# Altium PCB DIY_ST-Link_V21.PcbDoc
Units mm, origin at the board's own origin, x right, y up, seen from the top; angles counter-clockwise.
Board outline 45.5 x 38 mm, 2 copper layers (Top Layer, Bottom Layer), stack 1.581 mm thick; 66 components, 47 nets, 224 pads, 212 vias.
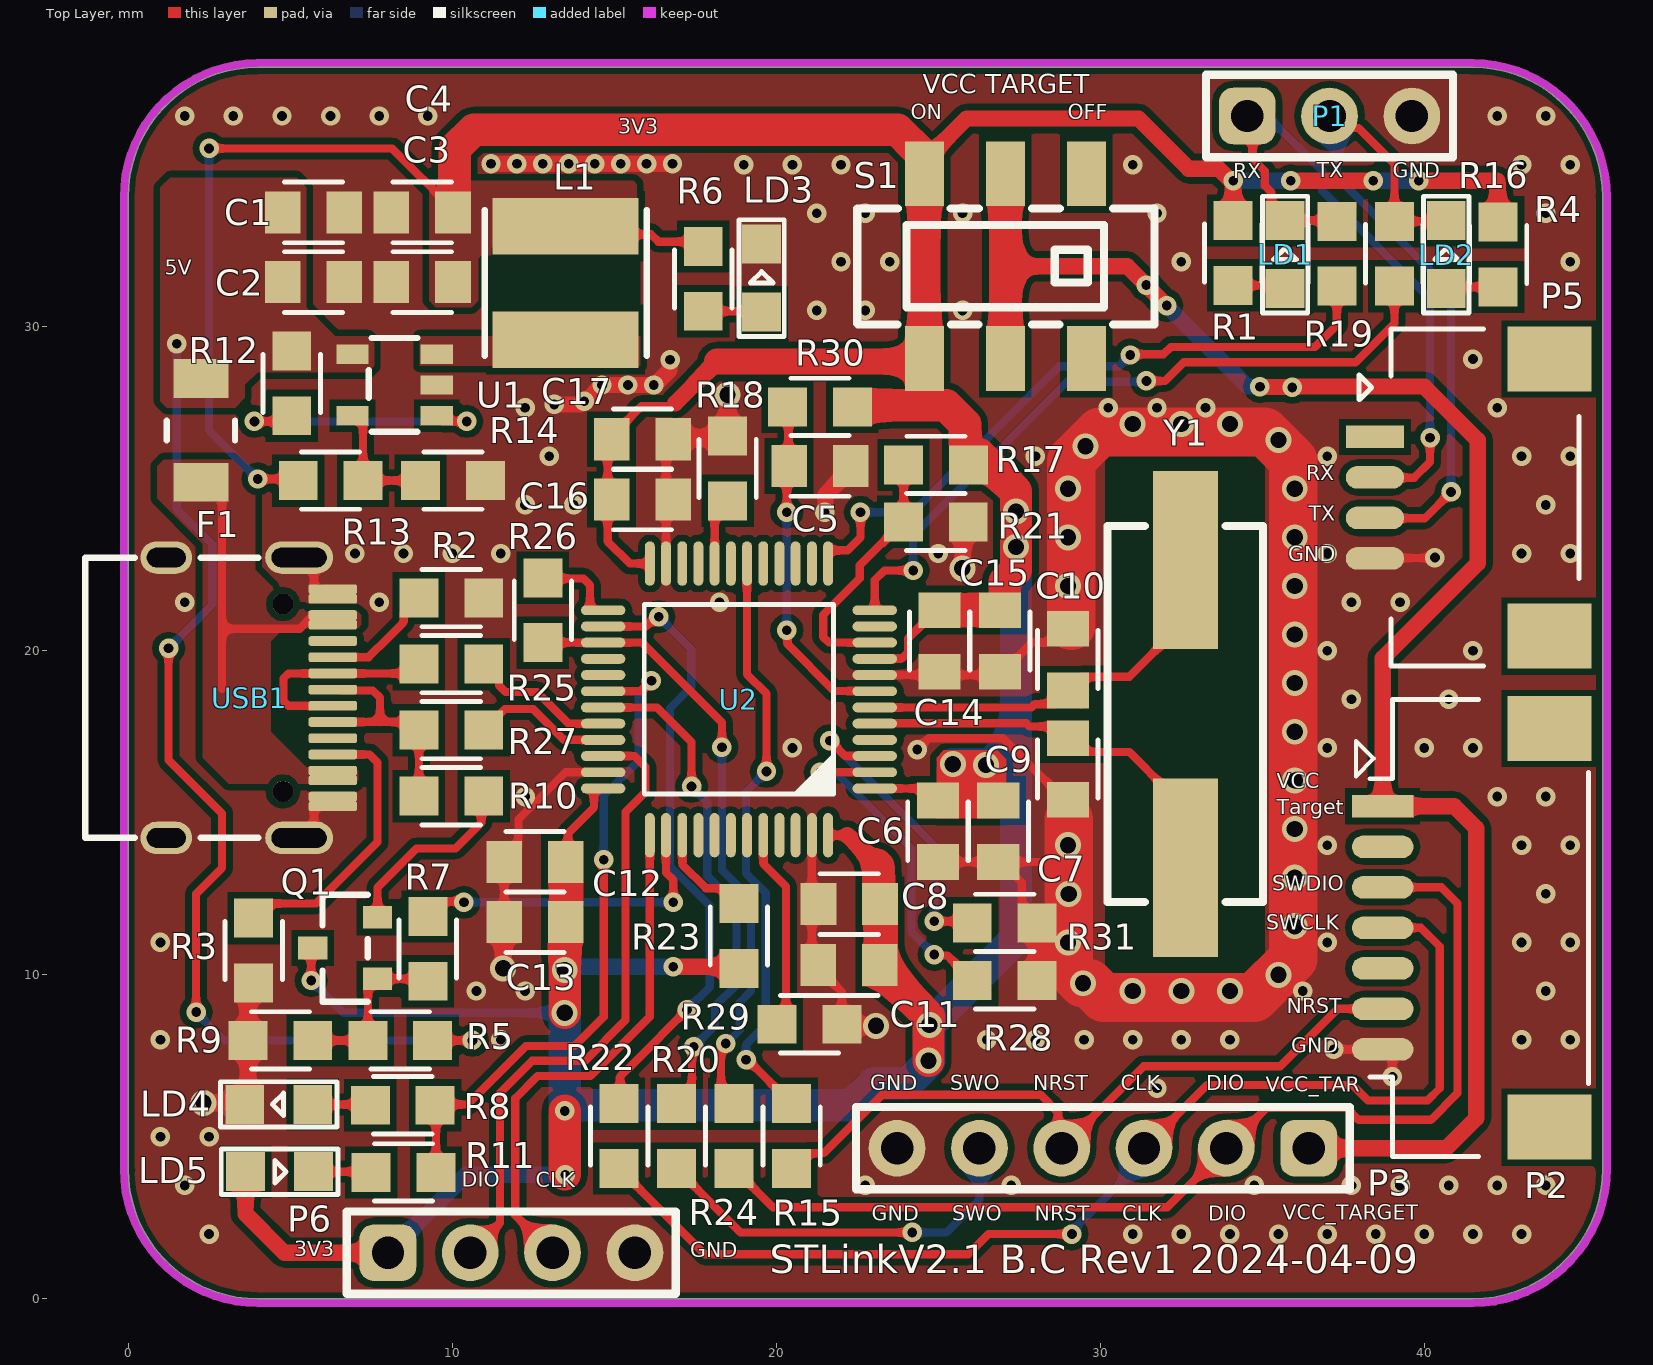
[diagram p0: Top Layer view]
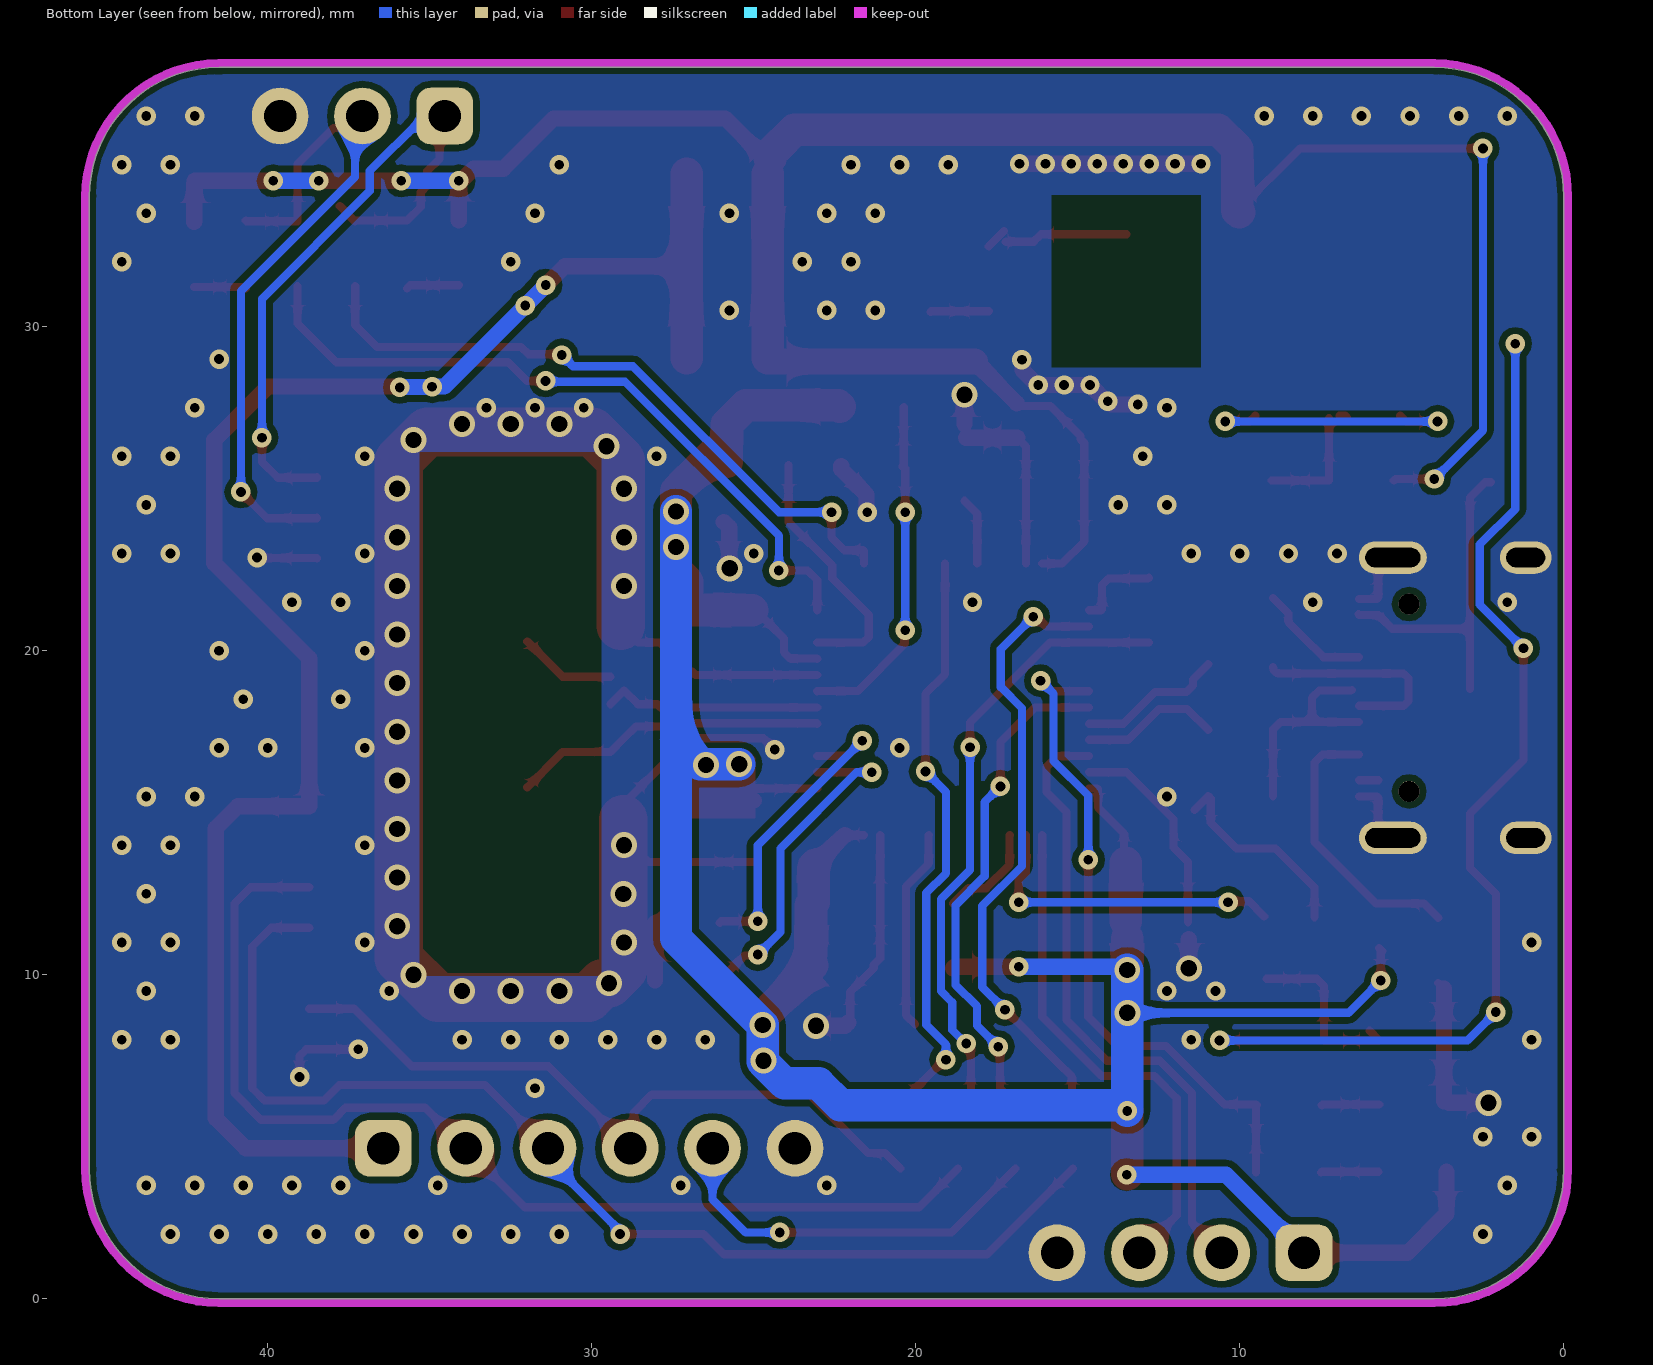
[diagram p1: Bottom Layer view, seen from below]
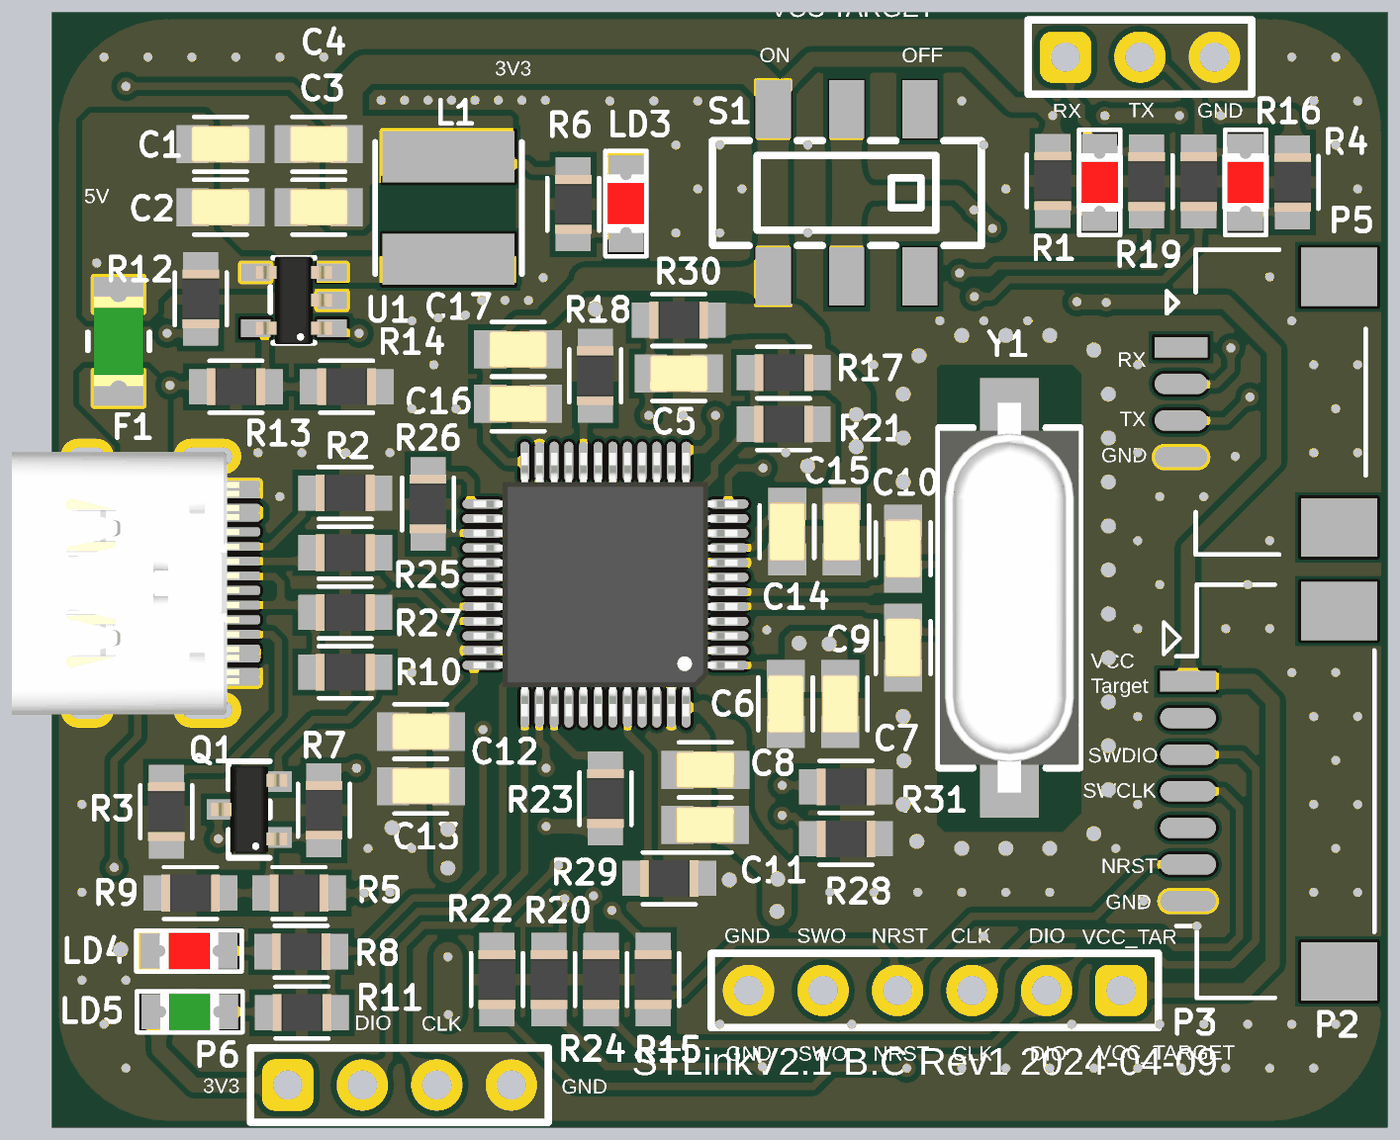
[diagram p2: 3D render of the assembled board from above, using the file's embedded part models]

## Layer stack, top to bottom
Top Solder: solder mask 0.0102, Solder Resist, Dk 3.5
Top Layer: signal copper 0.0356
Dielectric 1: dielectric 1.51, FR-4, Dk 4.8
Bottom Layer: signal copper 0.0356
Bottom Solder: solder mask 0.0102, Solder Resist, Dk 3.5

## Board outline
0,4 0,34 cw(c4,34) 4,38 41.5,38 cw(c41.5,34) 45.5,34 45.5,4 cw(c41.5,4) 41.5,0 4,0 cw(c4,4)

## Design rules (kind name [scope] priority, off if disabled: settings)
Clearance [All] p1: gap=0.2 ignorepadtopadclearanceinfootprint=TRUE
DiffPairsRouting [All] p1: maxlimit=0.254 minlimit=0.254 mostfreqgap=0.254 toplayer_minwidth=0.254 toplayer_maxwidth=0.381 toplayer_prefwidth=0.254 bottomlayer_minwidth=0.254 bottomlayer_maxwidth=0.381 bottomlayer_prefwidth=0.254 maxuncoupledlength=12.7
MinimumSolderMaskSliver [All] p1: minsoldermaskwidth=0
PlaneConnect [All] p1: planeconnectstyle=Direct reliefexpansion=0.508 reliefentries=4 reliefconductorwidth=0.254 reliefairgap=0.254
PolygonConnect [All] p1: connectstyle=Direct reliefconductorwidth=0.254 reliefentries=4 polygonreliefangle="90 Angle" airgapwidth=0.254
RoutingVias [All] p1: holewidth=0.5 width=0.8 viastyle="Through Hole" minholewidth=0.3 minwidth=0.5 maxholewidth=1 maxwidth=1.5
SilkToSilkClearance [All] p1: silktosilkclearance=0
SilkToSolderMaskClearance [IsPad] p1: minsilkscreentomaskgap=0 clearancetoexposedcopper=TRUE
SolderMaskExpansion [All] p1: expansion=0.102 istentingtop=FALSE
Width [All] p1: maxlimit=2 minlimit=0.254 preferedwidth=0.254 minimp=50.000000 maximp=50.000000 favimp=50.000000
25 further rules are at their usual default settings.

## Classes and differential pairs
differential pair USB: +USB_P -USB_N

## Components (designator, comment, footprint, x,y, rotation, side; value= is the part's Value field where it differs from the comment)
C1 "10u" 0805_CAP 5.725,33.525 r180 top
C2 "10u" 0805_CAP 5.725,31.375 r180 top
C3 "10u" 0805_CAP 9.075,31.375 r0 top
C4 "10u" 0805_CAP 9.075,33.525 r0 top
C5 "100n" 0805_CAP 21.35,25.7 r180 top
C6 "100n" 0805_CAP 24.993,14.429 r90 top
C7 "4.7u" 0805_CAP 26.85,14.429 r90 top
C8 "100n" 0805_CAP 22.254,12.182 r0 top
C9 "20p" 0805_CAP 29,16.35 r90 top
C10 "20p" 0805_CAP 29,19.725 r270 top
C11 "4.7u" 0805_CAP 22.25,10.3 r0 top
C12 "100n" 0805_CAP 12.554,13.482 r0 top
C13 "4.7u" 0805_CAP 12.554,11.625 r0 top
C14 "100n" 0805_CAP 25.043,20.304 r90 top
C15 "4.7u" 0805_CAP 26.9,20.304 r90 top
C16 "100n" 0805_CAP 15.871,24.668 r180 top
C17 "4.7u" 0805_CAP 15.871,26.525 r180 top
F1 "1Ah" 1206_PS 2.25,26.8 r90 top
L1 "3.3uH" IND_40x45x3.2 13.5,31.35 r90 top
LD1 "Red" LED0805_Red 35.7,32.225 r90 top
LD2 "Red" LED0805_Red 40.675,32.225 r90 top
LD3 "Red" LED0805_Red 19.55,31.5 r90 top
LD4 "Red" LED0805_Red 4.65,6 r180 top
LD5 "Green" LED0805_green 4.675,3.925 r0 top
P1 "PHDR1x3" HEADER_1X3 37.075,37.77 r0 top
P2 "A1253WRA" A1253WRA-7P 42.065,11.45 r270 top
P3 "HDR 1x6" HEADER_1x6 31.35,4.65 r180 top
P5 "A1253WRA" A1253WRA-4P 42.025,24.725 r270 top
P6 "HDR 1x4" HEADER_1x4 13.1,1.425 r0 top
Q1 "BC817" SOT23 6.7,10.825 r90 top
R1 "1K" 0805_res 34.1,32.275 r90 top
R2 "5.1K" 0805_res 9.975,21.625 r180 top
R3 "5.1K" 0805_res 3.875,10.75 r90 top
R4 "1K" 0805_res 42.275,32.225 r90 top
R5 "10K" 0805_res 8.4,7.975 r0 top
R6 "1K" 0805_res 17.75,31.475 r90 top
R7 "100R" 0805_res 9.25,10.8 r270 top
R8 "1K" 0805_res 8.475,5.975 r0 top
R9 "36K" 0805_res 4.7,7.975 r0 top
R10 "1.5K" 0805_res 9.975,15.512 r180 top
R11 "1K" 0805_res 8.5,3.9 r0 top
R12 "10K" 0805_res 5.05,28.25 r90 top
R13 "267K" 0805_res 6.25,25.25 r0 top
R14 "59K" 0805_res 10.025,25.25 r0 top
R15 "22R" 0805_res 20.475,5.025 r90 top
R16 "22R" 0805_res 39.075,32.25 r90 top
R17 "10K" 0805_res 24.929,25.732 r0 top
R18 "10K" 0805_res 18.5,25.625 r270 top
R19 "22R" 0805_res 37.3,32.25 r90 top
R20 "22R" 0805_res 16.925,5.025 r270 top
R21 "10K" 0805_res 24.925,23.975 r180 top
R22 "22R" 0805_res 15.15,5.025 r90 top
R23 "4.7K" 0805_res 18.85,11.2 r90 top
R24 "22R" 0805_res 18.7,5.025 r90 top
R25 "10R" 0805_res 9.975,19.587 r180 top
R26 "100R" 0805_res 12.8,21.25 r90 top
R27 "10R" 0805_res 9.975,17.55 r180 top
R28 "10K" 0805_res 27.05,9.825 r0 top
R29 "10K" 0805_res 21.025,8.475 r180 top
R30 "100K" 0805_res 21.35,27.525 r180 top
R31 "10K" 0805_res 27.05,11.6 r0 top
S1 "Slide DPDT" SW_DPDT_SMD 26.475,32.05 r180 top
U1 "MT3520B" SOT23-5 8.225,28.2 r180 top
U2 "STM32F103CBT6" LQFP-48 18.85,18.5 r180 top
USB1 "Type-C" Type-C-TOP 3.8,18.55 r180 top
Y1 "8MHz" Xtal_HC49_US 32.625,18.05 r90 top value="XTAL = 32MHz"

## Footprints (in the part's own frame and the unit in brackets; to place one, negate y for a bottom-side part, rotate by r counter-clockwise, add the part's x,y. Pads: shape width x height; smd on the part's side, far side on the other; paste and mask are expansions set on the pad)
0805_CAP [mm] "Capacitor standard 2012"
  rect 1.1x1.3 smd mask+0: 1(-0.95,0) 2(0.95,0)
  silkscreen extent -0.9,-0.94 0.9,0.94, body extent -1,-0.62 1,0.63, height 1
0805_res [mm] "Resistor standard 2012"
  rect 1.2x1.2 smd mask+0: 1(-1,0) 2(1,0)
  silkscreen extent -0.9,-0.89 0.9,0.89, body extent -1,-0.62 1,0.63, height 0.45
1206_PS [mm] "3216 - 3.2 x 1.6 x max 0.75mm high"
  rect 1.2x1.7 smd: 1(-1.6,0) 2(1.6,0)
  silkscreen extent -0.3,-1.05 0.3,1.05, body extent -1.52,-0.85 1.53,0.85, height 0.8
A1253WRA-4P [mm]
  rect 0.7x1.8 smd mask+0.1: 1(-1.875,-3.55)
  oval 0.7x1.8 smd mask+0.1: 2(-0.625,-3.55) 3(0.625,-3.55) 4(1.875,-3.55)
  rect 2x2.6 smd mask+0.1: ""(-4.275,1.84) ""(4.275,1.84)
  silkscreen extent -5.2,-4.04 5.2,2.75, body extent -5,-3 5,3, height 2.6
A1253WRA-7P [mm]
  rect 0.7x1.9 smd mask+0.1: 1(-3.75,-3.35)
  oval 0.7x1.9 smd mask+0.1: 2(-2.5,-3.35) 3(-1.25,-3.35) 4(0,-3.35) 5(1.25,-3.35) 6(2.5,-3.35) 7(3.75,-3.35)
  rect 2x2.6 smd mask+0.1: ""(-6.15,1.8) ""(6.15,1.8)
  silkscreen extent -7.05,-4.18 7.05,3, body extent -6.9,-3 6.9,2.9, height 2.6
HEADER_1X3 [mm] "Header 2.54mm pitch 3 pins with pin 1 marker"
  rrect50% 1.75x1.75 hole 1 mask+0: 1(-2.54,-1.27)
  round 1.75 hole 1 mask+0: 2(0,-1.27) 3(2.54,-1.27)
  silkscreen extent -3.81,-2.54 3.81,0, body extent -3.8,-2.54 3.81,0, height 8.6
HEADER_1x4 [mm] "Header 2.54mm pitch 4 pins"
  rrect50% 1.75x1.75 hole 1 mask+0: 1(-5.08,0)
  round 1.75 hole 1 mask+0: 2(-2.54,0) 3(0,0) 4(2.54,0)
  silkscreen extent -6.35,-1.27 3.8,1.27, body extent -6.33,-1.27 3.7,1.27, height 8.6
HEADER_1x6 [mm] "Header 2.54mm pitch 6 pins"
  rrect50% 1.75x1.75 hole 1 mask+0: 1(-5.08,0)
  round 1.75 hole 1 mask+0: 2(-2.54,0) 3(0,0) 4(2.54,0) 5(5.08,0) 6(7.62,0)
  silkscreen extent -6.35,-1.27 8.89,1.27, body extent -6.33,-1.27 8.89,1.27, height 8.6
IND_40x45x3.2 [mm]
  rect 1.75x4.5 smd: 1(-1.75,0) 2(1.75,0)
  silkscreen extent -2.25,-2.5 2.25,2.5, body extent -2.25,-2 2.25,2, height 3.2
LED0805_green [mm] "LED 0805, 2.0 x 1.2 x 0.4mm high"
  rect 1.2x1.2 smd: 1(-1.05,0) 2(1.05,0)
  silkscreen extent -1.8,-0.7 1.8,0.7, body extent -1,-0.62 1,0.63, height 1.08
LED0805_Red [mm] "LED 0805, 2.0 x 1.2 x 0.4mm high"
  rect 1.2x1.2 smd: 1(-1.05,0) 2(1.05,0)
  silkscreen extent -1.8,-0.7 1.8,0.7, body extent -1,-0.62 1,0.63, height 1.08
LQFP-48 [mil]
  oval 54x12 smd: 1(-165,108.27) 2(-165,88.58) 3(-165,68.9) 4(-165,49.21) 5(-165,29.53) 6(-165,9.84) 7(-165,-9.84) 8(-165,-29.53) 9(-165,-49.21) 10(-165,-68.9) 11(-165,-88.58) 12(-165,-108.27) 25(165,-108.27) 26(165,-88.58) 27(165,-68.9) 28(165,-49.21) 29(165,-29.53) 30(165,-9.84) 31(165,9.84) 32(165,29.53) 33(165,49.21) 34(165,68.9) 35(165,88.58) 36(165,108.27)
  oval 12x54 smd: 13(-108.27,-165) 14(-88.58,-165) 15(-68.9,-165) 16(-49.21,-165) 17(-29.53,-165) 18(-9.84,-165) 19(9.84,-165) 20(29.53,-165) 21(49.21,-165) 22(68.9,-165) 23(88.58,-165) 24(108.27,-165) 37(108.27,165) 38(88.58,165) 39(68.9,165) 40(49.21,165) 41(29.53,165) 42(9.84,165) 43(-9.84,165) 44(-29.53,165) 45(-49.21,165) 46(-68.9,165) 47(-88.58,165) 48(-108.27,165)
  silkscreen extent -115,-115 115,115, body extent -177,-177 177,177, height 61
SOT23 [mm] "SOT23- 3 pin foot print, 2.5 x 3 x 1.1 body, 1.5 x 3 x 1.1"
  rect 0.7x0.9 smd mask+0: 1(-0.95,-1) 2(0.95,-1) 3(0,1)
  silkscreen extent -1.65,-0.7 1.65,0.7, body extent -1.5,-1.3 1.5,1.3, height 1.1
SOT23-5 [mm] "SOT23-5, Body 1.6 x 2.9 x 1.3H, 1.95mm pitch"
  rect 1x0.6 smd: 1(-1.3,0.95) 2(-1.3,0) 3(-1.3,-0.95) 4(1.3,-0.95) 5(1.3,0.95)
  silkscreen extent -0.7,-1.45 0.8,1.45, body extent -1.3,-1.5 1.3,1.5, height 1.1
SW_DPDT_SMD [mm]
  rect 1.2x2 smd paste+0 mask+0.051: 1(-3.095,3.033) 2(-0.595,3.033) 3(1.905,3.033) 4(-3.095,-2.667) 5(-0.595,-2.667) 6(1.905,-2.667)
  silkscreen extent -5.19,-1.59 3.98,1.98, body extent -5.15,-1.55 3.95,1.95, height 5.5
Type-C-TOP [mm]
  round 0.65 hole 0.65: 0(-0.98,2.89) 0(-0.98,-2.89)
  oval 1.6x1 hole 0.6 slot 1.2 at 0 deg: 1(2.62,4.325) 2(2.62,-4.325)
  oval 2.1x1 hole 0.6 slot 1.7 at 0 deg: 3(-1.48,-4.325) 4(-1.48,4.325)
  rrect50% 1.5x0.3 smd: A1(-2.52,-3.35) A4(-2.52,-2.55) A5(-2.52,-1.25) A6(-2.52,-0.25) A7(-2.52,0.25) A8(-2.52,1.25) A9(-2.52,2.55) A12(-2.52,3.35) B1(-2.52,3.05) B4(-2.52,2.25) B5(-2.52,1.75) B6(-2.52,0.75) B7(-2.52,-0.75) B8(-2.52,-1.75) B9(-2.52,-2.25) B12(-2.52,-3.05)
  silkscreen extent -0.22,-4.33 5.12,4.33, body extent -2.57,-4.48 5.18,4.48, height 3.26
Xtal_HC49_US [mm] "Crystal HC49, 12.3 (Body 11.4) x 4.7 x 4.3"
  rect 5.5x2 smd mask+0: 1(-4.75,0) 2(4.75,0)
  silkscreen extent -5.8,-2.4 5.8,2.4, body extent -6.65,-2.37 6.65,2.36, height 4.51

## Part data
C1 C2 C3 C4 C5 C6 C7 C8 C9 C10 C11 C12 C13 C14 C15 C16 C17: library part CC_?F_0805, "Capacitor, Ceramic,, ?F, ?V, 0805"
F1: library part Fuse_PS_1A6V_3216, "Fuse, Polyswitch, 1Ah 1.8At, 6V, 8A @300msec, 210mRmax, 1206 [3216]", Category=Fuse, Supplier 2=Farnell, Supplier Part Number 2=1861192, URL=http://www.farnell.com/datasheets/1678471.pdf
L1: library part IND_?uH_4045, "https://www.lcsc.com/product-detail/Inductors-SMD_SHOU-HAN-CY43-3-3UH_C2929417.html"
LD1 LD2 LD3 LD4: library part LED_RED230mcd_2013, "LED, Red, 2.0V, Imax 30mA, 120deg. At 20mA => Wavelength = 630nm, 230mcd, 0805", Manufacturer=Kingbright, Category="Diode - LED", Mfg_PN=KPT-2012SURCK, Supplier 2=Farnell, Supplier Part Number 2=2099241, URL=http://www.farnell.com/datasheets/1753997.pdf, Used_for=Alarm
LD5: library part LED_GRN50mcd_2013, "LED, Green, 2.1V, Imax 30mA, 110deg. At 20mA => Wavelength = 570nm, 50mcd, 0805", Manufacturer=Kingbright, Category="Diode - LED", Mfg_PN=KPHCM-2012CGCK, Supplier 2=Element14, Supplier 3=Digikey, Supplier Part Number 2=1686075, Supplier Part Number 3=754-1127-1-ND, Used_for="ACC ON"
P1: library part Header1x3, "Header, 3 pin SIL, 2.54 pitch", Supplier Part Number 1=TE295, Category=Connector, Notes="TE295 is actually a 40 pin break away header", Supplier 1=Brooks
P2: library part A1253WRA-7P, "A1253WRA-4P", Supplier Part Number 1=TE295, Category=Connector, Date Updated=1/7/2014, Engineer’s Name=WZ, Notes="TE295 is actually a 40 pin break away header", Supplier 1=Brooks
P3: library part Header1x6, "Header_1x6", Supplier Part Number 1=TE295, Category=Connector, Notes="TE295 is actually a 40 pin break away header", Supplier 1=Brooks
P5: library part A1253WRA-4P, "A1253WRA-4P", Supplier Part Number 1=TE295, Category=Connector, Date Updated=1/7/2014, Engineer’s Name=WZ, Notes="TE295 is actually a 40 pin break away header", Supplier 1=Brooks
P6: library part Header1x4, "Header_1x4", Supplier Part Number 1=TE295, Category=Connector, Date Updated=1/7/2014, Engineer’s Name=WZ, Notes="TE295 is actually a 40 pin break away header", Supplier 1=Brooks
Q1: library part TR_BC817, "TRANSISTOR, NPN, SOT-23, 45V", Manufacturer=NXP, Category=Transistor, Mfg_PN=BC817, Note="TRANSISTOR, NPN, SOT-23, 45V", PackageDescription="3-Pin SOT-23 Package 0.95 mm Pitch, 2.3 mm Lead Span", PackageReference=SOT23, Supplier 2="Element 14", Supplier 3=Digikey, Supplier Part Number 2=1081223, Supplier Part Number 3=1727-2919-1-ND
R1 R2 R3 R4 R5 R6 R7 R8 R9 R10 R11 R12 R13 R14 R15 R16 R17 R18 R19 R20 R21 R22 R23 R24 R25 R26 R27 R28 R29 R30 R31: library part RS_?R_0805, "Resistor, ?ohm, 0805"
S1: library part SW_Slide_DPDT, "LCSC#: C2906280 / Mfr.#: MST22D18G2 125 / Mfr: SHOU HAN / Brick nogging 0.1A DPDT 12V Black 10000次 SMD Slide Switches ROHS"
U1: library part BUCK_MT3520B, "https://www.lcsc.com/product-detail/DC-DC-Converters_XI-AN-Aerosemi-Tech-MT3520B_C2684933.html"
U2: "ARM Cortex-M3 32-bit MCU, 128 KB Flash, 20 KB Internal RAM, 37 I/Os, 48-pin LQFP, -40 to 85 degC, Tray", I/Os (High Current)=37, Operating Frequency(F) (Processor speed) (MHz)=72, Supplier Part Number 1=497-6288-ND, Supply Voltage(Vcc) min (V)=2, A/D Converter="2x12-bit (10 Channel)", ComponentLink1Description="Manufacturer URL", ComponentLink1URL=http://www.st.com/web/en/home.html, ComponentLink2Description=Datasheet, ComponentLink2URL=http://www.st.com/st-web-ui/static/active/en/resource/technical/document/datasheet/CD00161566.pdf, ComponentLink3Description="Package Specification", ComponentLink3URL=http://www.st.com/st-web-ui/static/active/en/resource/technical/document/datasheet/DM00058181.pdf, Core="ARM Cortex-M3", DatasheetVersion="Rev. 16", FLASH Size (Prog) (kB)=128, Internal RAM Size (kB)=20, Mounting Technology="Surface Mount", PackageDescription="48-Pin Low Profile Quad Flat Package, 7 x 7 mm Body, 0.5 mm Pitch", PackageReference=LQFP48, PackageVersion="Rev. 6, 06/2013", Packing=Tray, PartNumber=STM32F103CBT6, Supplier 1=Digi-Key, Supplier 2=Farnell, Supplier 3=Newark, Supplier 4=Newark, Supplier 5=Mouser, Supplier Part Number 2=1606327, Supplier Part Number 3=11N8296, Supplier Part Number 4=57P1214, Supplier Part Number 5=511-STM32F103CBT6
USB1: library part USB-Type-C-TOP, "https://www.lcsc.com/product-detail/span-style-background-color-ff0-USB-span-Connectors_DEALON-USB-TYPE-C-018_C2927038.html"
Y1: library part XTAL-SMD_HC49, "Crystal, SMD, HC49 Size", Manufacturer="Abracon Corporation", Mfg_PN=ABM2-32.000MHZ-D4YF-T, Note="Crystal Oscillator, 32MHZ, 18PF, SMD, 30ppm, 50ohm, Fundamental", Supplier 2=Digi-Key, Supplier Part Number 2=535-10894-2-ND

## Via types
v1: diameter 0.6, hole 0.3, Top Layer to Bottom Layer, tented both sides, 173 vias
v2: diameter 0.8, hole 0.5, Top Layer to Bottom Layer, tented both sides, 39 vias

## Nets (pads, with @x,y where several pads share a name; then routed paths per layer and width w, separated by ;. In a path a pad name is that pad's centre, name@x,y a point inside that pad or via, vN(x,y) a via of type N, cw(c..) or ccw(c..) an arc to the next point about the centre after c; other vN are vias at no path point)
3V3: C3.2 C4.2 C6.2 C7.2 C8.2 C11.2 C12.2 C13.2 C14.2 C15.2 C16.2 C17.2 L1.2 LD5.1 P6.1 Q1.3 R1.2 R4.2 R6.2 R13.1 R17.2 R23.1 R30.1 S1.3 S1.6 U2.1 U2.9 U2.24 U2.36 U2.48 | length 187.2
  Top Layer w0.254: v1(2.5,35.5) 8.15,35.5 10.025,33.625 C4.2 ; v1(4,25.3) 5.2,25.3 R13.1 ; v1(5.65,9.825) 5.65,10.675 5.6,10.725 Q1.3 ; L1.2@13.5,32.85 16.136,32.85 16.363,32.623 R6.2@17.225,32.623 ; C13.2 C13.2@13.525,11.646 ; C12.2 13.571,13.549 13.571,14.364 14.375,15.168 14.375,15.727 14.398,15.75 U2.36 ; U2.24 15.484,22.691 14.8,23.375 14.8,26.404 C17.2 14.921,26.625 15.846,27.55 16.8,27.55 16.887,27.638 ; R6.2@17.277,32.948 R6.2 ; U2.48 22.191,14.309 ; U2.1 25.393,15.75 26.479,15.75 C7.2 ; U2.9 23.051,19.76 23.876,19.76 24.066,19.95 24.066,20.377 24.943,21.254 C14.2
  Top Layer w0.5: LD5.1 3.625,2.625 4.825,1.425 P6.1 ; v1@13.475,3.85 v1(13.494,3.831) ; v1(16.825,10.25) 18.8,10.25 R23.1 ; 16.888,27.638 18.175,28.925 ; 22.191,14.309 23.1,13.4 ; C11.2 23.2,10.2 23.5,9.9 C11.2@23.525,9.9 ; S1.6 24.57,35.117 25.878,36.425 31.175,36.425 32.725,34.875 33.65,34.875 34.1,34.425 R1.2 ; C6.2 25.093,15.379 25.393,15.679 25.393,15.75 25.393,16.443 v2(25.45,16.5) ; v1(35.875,34.5) v1(38.425,34.5) ; v1(39.825,34.5) 42.25,34.5 ; 42.25,34.425 42.262,34.413 42.262,33.238 R4.2
  Top Layer w0.8: 18.175,28.925 S1.3@24.57,28.925
  Top Layer w1: C4.2 10.075,33.575 10.075,35.489 10.661,36.075 23.75,36.075 24.47,35.355 24.47,35.217 S1.6@24.501,35.186 ; v2(13.473,8.827) v2(13.475,10.15) v2(13.475,10.15) C13.2@13.475,11.125 ; v1@13.475,3.85 v1(13.475,5.8) ; C13.2@13.525,11.646 C12.2@13.525,13.461 ; R30.1 22.4,27.575 25.243,27.575 25.829,26.989 R17.2@25.829,25.832 ; 23.1,13.4 23.154,13.346 23.154,12.232 C8.2 23.236,12.15 23.236,10.336 C11.2 ; C11.2@23.525,9.9 24.725,8.7 v2(24.725,8.45) 24.7,8.425 v2(24.7,7.35) ; S1.3 S1.6 ; C14.2 C15.2 27,21.254 27.05,21.304 27.05,22.135 27.4,22.485 v2(27.4,23.2) v2(27.4,24.3) 27.4,24.925 R17.2@26.261,26.064
  Bottom Layer w0.254: v1(2.5,35.5) 2.5,26.8 v1(4,25.3) ; v1(5.65,9.825) 6.648,8.827 v2(13.473,8.827)
  Bottom Layer w0.5: P6.1 10.426,3.831 v1(13.494,3.831) ; v2(13.475,10.15) 13.556,10.15 13.656,10.25 v1(16.825,10.25) ; v1(34.1,34.5) v1(35.875,34.5) ; v1(38.425,34.5) v1(39.825,34.5)
  Bottom Layer w1: v1(13.475,5.8) 13.475,8.825 v2(13.473,8.827) v2(13.475,10.15) v2(13.475,10.15) ; v1@13.475,5.975 22.325,5.975 23,6.65 24.05,6.65 24.725,7.325 v2(24.725,8.45) 27.4,11.125 27.4,17.25 ; v2(25.45,16.5) 26.475,16.5 26.65,16.5 27.4,17.25 ; v2(27.4,24.3) v2(27.4,23.2) 27.4,17.25
  other v2: 26.475,16.475
5V: C1.2 C2.2 F1.2 R5.2 R12.2 U1.4 | length 32.8
  Top Layer w0.254: v1(1.25,20.075) 1.25,16.625 2.9,14.975 2.9,13.3 2.1,12.5 v1(2.1,8.85) ; R5.2 v1(10.625,7.975)
  Bottom Layer w0.254: v1(1.25,20.075) 2.6,21.425 2.6,23.275 1.5,24.375 v1(1.5,29.475) ; v1(2.1,8.85) 2.975,7.975 v1(10.625,7.975)
GND: C1.1 C2.1 C3.1 C4.1 C5.1 C6.1 C7.1 C8.1 C9.1 C10.1 C11.1 C12.1 C13.1 C14.1 C15.1 C16.1 C17.1 LD3.2 LD4.2 P1.3 P2.7 P3.6 P5.4 P6.4 R2.1 R3.1 R9.1 R14.2 R18.1 R21.1 R28.2 R29.1 R31.2 U1.2 U2.8 U2.23 U2.35 U2.47 USB1.1 USB1.2 USB1.3 USB1.4 USB1.A1 USB1.A12 USB1.B1 USB1.B12 | length 111.9
  Top Layer w0.254: LD4.2@3.55,6.05 LD4.2 LD4.2@3.7,6.1 ; R3.1@3.7,9.575 R3.1 ; USB1.4 5.393,14.225 5.737,14.57 5.737,15.477 5.76,15.5 USB1.B1 ; USB1.3 5.393,22.875 5.737,22.53 5.737,21.623 5.76,21.6 USB1.B12 ; C13.1 C12.1 12.05,13.928 12.05,14.8 13.5,16.25 U2.35 ; U2.23 16.6,26.304 C17.1 C17.1@16.871,26.575 ; R18.1@18.45,26.575 R18.1 ; U2.47 21.1,10.5 C11.1 21.3,10.2 22.025,9.475 R29.1 ; R29.1@22.075,8.525 R29.1@22.175,8.625 ; U2.8 25.043,19.25 26.796,19.25 C15.1 27,19.354 27.898,20.252 28.577,20.252 C10.1 ; v1(24.35,16.95) 24.7,17.3 27,17.3 28.9,15.4 C9.1 29,14.225 28.254,13.479 C7.1@26.95,13.479 ; C6.1 C7.1 C7.1@26.95,13.479 ; R31.2 27.577,12.073 27.577,12.852 C7.1@26.95,13.479 ; C10.1@28.477,21.098 28.9,20.675 C10.1 ; C10.1@29.523,21.098 29.1,20.675 C10.1 ; v1(37.2,7.7) 38.809,7.7 39.015,7.494 v1(39.015,6.85) ; P5.4 38.487,22.862 40.312,22.862 v1(40.325,22.875)
  Top Layer w0.5: v2(2.325,6.05) LD4.2@3.55,6.05 ; LD4.2@3.7,6.1 R9.1 R3.1@3.7,9.575 ; v1(11.2,35.025) v1(12,35.025) v1(12.8,35.025) v1(13.6,35.025) v1(14.4,35.025) v1(15.2,35.025) v1(16,35.025) v1(16.8,35.025) ; v2(11.575,10.2) C13.1@11.575,11.1 ; v1(13.15,27.6) 13.975,27.6 v1(14.075,27.7) 14.125,27.7 v1(14.625,28.2) v1(16.225,28.2) ; v1@16.25,28.2 16.706,28.656 16.706,28.956 v1(16.725,28.975) ; C17.1@16.871,26.575 R18.1@18.45,26.575 ; R18.1@18.5,26.988 v2(18.5,27.9) ; v1(21.5,24.275) 21.519,24.294 21.519,24.819 22.3,25.6 C5.1 ; R29.1@22.075,8.525 22.175,8.425 v2(23.075,8.425) ; v2(25.743,22.543) 25.757,22.557 25.757,23.807 R21.1 ; R28.2 R31.2
  Top Layer w1.5: 29.025,14.799 29.025,14 v2(29.025,12.489) 29.025,11 29.025,10.179 v2(29.464,9.739) 29.661,9.739 30.1,9.3 32.5,9.3 34,9.3 34.75,9.3 35.95,10.5 35.95,11.5 35.95,13 35.95,14.5 35.95,16 35.95,17.5 35.95,19 35.95,20.5 35.95,22 35.95,23.5 35.95,25 35.95,25.871 35.071,26.75 34,26.75 32.5,26.75 31,26.75 29.979,26.75 v2(29.539,26.311) 29.1,25.871 29.1,25 29.1,23.5 29.1,22 C10.1@29.1,20.775
  other v1: 2.5,2 31,2 32.5,2 34,2 35.5,2 37,2 38.5,2 40,2 41.5,2 43,2 1.75,3.5 22.75,3.5 27.25,3.5 34.75,3.5 37.75,3.5 39.25,3.5 40.75,3.5 42.25,3.5 43.75,3.5 1,5 2.5,5 31.75,6.5 1,8 11.5,8 26.5,8 28,8 29.5,8 31,8 32.5,8 34,8 43,8 44.5,8 10.75,9.5 12.25,9.5 36.25,9.5 43.75,9.5 1,11 37,11 43,11 44.5,11 43.75,12.5 37,14 43,14 44.5,14 12.25,15.5 42.25,15.5 43.75,15.5 20.5,17 37,17 40,17 41.5,17 37.75,18.5 40.75,18.5 37,20 41.5,20 1.75,21.5 7.75,21.5 18.25,21.5 37.75,21.5 39.25,21.5 7,23 8.5,23 10,23 11.5,23 25,23 37,23 43,23 44.5,23 12.25,24.5 13.75,24.5 43.75,24.5 13,26 28,26 37,26 43,26 44.5,26 12.25,27.5 30.25,27.5 31.75,27.5 33.25,27.5 42.25,27.5 15.425,28.2 41.5,29 21.25,30.5 22.75,30.5 25.75,30.5 22,32 23.5,32 32.5,32 44.5,32 21.25,33.5 22.75,33.5 25.75,33.5 31.75,33.5 43.75,33.5 19,35 20.5,35 22,35 31,35 43,35 44.5,35 1.75,36.5 3.25,36.5 4.75,36.5 6.25,36.5 7.75,36.5 9.25,36.5 42.25,36.5 43.75,36.5
  other v2: 31,9.5 32.5,9.5 34,9.5 35.5,10 29,11 36,11.5 36,13 29,14 36,14.5 36,16 36,17.5 36,19 36,20.5 29,22 36,22 29,23.5 36,23.5 29,25 36,25 35.5,26.5 31,27 32.5,27 34,27
LED_STLINK: R8.2 R11.2 U2.30 | length 21
  Top Layer w0.254: R11.2 9.5,5.95 R8.2 9.5,6 10.475,6 12.275,7.8 13.775,7.8 14.675,8.7 v1(14.675,13.55) ; U2.30 15.825,18.75 v1(16.15,19.075)
  Bottom Layer w0.254: v1(14.675,13.55) 14.675,15.525 15.75,16.6 15.75,18.675 v1(16.15,19.075)
NetC5_2: C5.2 R30.2 U2.7 | length 10.7
  Top Layer w0.254: v1(20.325,20.633) 20.349,20.609 20.349,20.201 21.79,18.76 23.031,18.76 U2.7 ; v1(20.325,24.275) 20.325,25.625 C5.2 ; R30.2@20.375,27.525 20.375,25.7 C5.2@20.4,25.675
  Bottom Layer w0.254: v1(20.325,20.633) v1(20.325,24.275)
NetC9_2: C9.2 U2.5 Y1.1 | length 9.8
  Top Layer w0.254: U2.5 23.051,17.76 27.715,17.76 27.81,17.665 28.635,17.665 C9.2 29.423,16.877 30.898,16.877 Y1.1@31.987,15.788
NetC10_2: C10.2 U2.6 Y1.2 | length 9.8
  Top Layer w0.254: U2.6 27.875,18.25 27.977,18.352 28.577,18.352 C10.2 C10.2@29.423,18.352 ; C10.2@29.423,19.198 30.898,19.198 Y1.2@31.987,20.288
NetL1_1: L1.1 U1.3
NetLD1_1: LD1.1 R1.1 | length 1.6
  Top Layer w0.254: R1.1 35.6,31.275 LD1.1
NetLD2_1: LD2.1 R4.1 | length 1.6
  Top Layer w0.254: LD2.1 40.725,31.225 R4.1
NetLD3_1: LD3.1 R6.1 | length 1.8
  Top Layer w0.254: R6.1 19.525,30.475 LD3.1
NetLD4_1: LD4.1 R8.1 | length 1.8
  Top Layer w0.254: LD4.1 7.45,6 R8.1
NetLD5_2: LD5.2 R11.1 | length 1.8
  Top Layer w0.254: LD5.2 7.475,3.925 R11.1
NetQ1_1: Q1.1 R5.1 R7.2 R9.2 | length 5.7
  Top Layer w0.254: R9.2@6,8.275 R9.2 R5.1 7.4,9.652 7.623,9.875 Q1.1 R7.2@9.175,9.875
NetQ1_2: Q1.2 R10.1 | length 6.4
  Top Layer w0.254: Q1.2 7.7,12.7 8.9,13.9 10.1,13.9 10.9,14.7 10.9,15.438 R10.1 R10.1@11.4,15.087
NetR2_2: R2.2 USB1.A5 | length 3.6
  Top Layer w0.254: USB1.A5 7.425,19.8 8.038,20.413 8.502,20.877 8.502,21.152 R2.2
NetR3_2: R3.2 USB1.B5 | length 8.7
  Top Layer w0.254: R3.2 4.325,12.2 5.8,12.2 7.7,14.1 7.7,16.55 7.45,16.8 USB1.B5
NetR12_1: R12.1 U1.1 | length 8.8
  Top Layer w0.254: v1(3.9,27.075) 4.875,27.075 R12.1 ; U1.1 9.7,27.075 v1(10.45,27.075)
  Bottom Layer w0.254: v1@3.9,27.1 3.925,27.075 v1(10.45,27.075)
NetR13_2: R13.2 R14.1 U1.5 | length 4.1
  Top Layer w0.254: U1.5@6.7,27.2 6.75,27.25 U1.5 U1.5@6.85,27.175 ; U1.5@7.25,27.175 R13.2 R14.1
NetR15_2: R15.2 U2.18 | length 18.3
  Top Layer w0.254: v1(19.069,7.383) 19.117,7.383 R15.2 ; U2.18 19.101,22.69 19.101,19.274 19.7,18.675 v1(19.7,16.275)
  Bottom Layer w0.254: v1(19.069,7.383) 19.069,7.852 19.679,8.462 19.679,12.521 19.069,13.131 19.069,15.644 v1(19.7,16.275)
NetR16_1: R16.1 U2.12 | length 21.8
  Top Layer w0.254: U2.12 23.041,22.179 23.337,22.475 v1(24.225,22.475) ; v1(31.425,28.325) 32,28.325 32.575,28.9 37.875,28.9 39.075,30.1 R16.1
  Bottom Layer w0.254: v1(24.225,22.475) 24.225,23.55 28.975,28.3 v1@31.2,28.3
NetR17_1: R17.1 R21.2 U2.10 | length 8
  Top Layer w0.254: U2.10 21.625,20.25 21.45,20.425 21.45,21.1 22.576,22.226 22.576,22.626 R21.2 23.929,23.979 R17.1
NetR18_2: R18.2 U2.20 | length 2.1
  Top Layer w0.254: U2.20 18.1,24.225 R18.2
NetR19_1: R19.1 U2.13 | length 20.6
  Top Layer w0.254: U2.13 21.6,23.074 21.623,23.097 22.197,23.097 22.6,23.5 v1(22.6,24.275) ; v1(30.925,29.125) 30.95,29.15 31.95,29.15 32.175,29.375 36.625,29.375 37.3,30.05 R19.1
  Bottom Layer w0.254: v1(22.6,24.275) 24.225,24.275 28.725,28.775 30.575,28.775 v1(30.925,29.125)
NetR20_1: R20.1 U2.31 | length 15.7
  Top Layer w0.254: U2.31 16.325,18.25 17.388,17.187 v1(17.388,15.812) ; R20.1 17.398,6.498 17.398,7.723 v1(17.459,7.784)
  Bottom Layer w0.254: v1(17.388,15.812) 17.873,15.327 17.873,13.043 18.771,12.145 18.771,9.688 18.114,9.031 18.114,8.439 v1(17.459,7.784)
NetR22_2: R22.2 U2.26 | length 19.2
  Top Layer w0.254: U2.26 15.981,20.75 16.281,21.05 v1(16.375,21.05) ; R22.2 15.182,6.057 15.182,6.857 15.625,7.3 v1(17.25,8.925)
  Bottom Layer w0.254: v1(16.375,21.05) 17.375,20.05 17.375,18.875 16.725,18.225 16.725,13.35 17.95,12.125 17.95,9.625 v1(17.25,8.925)
NetR23_2: R23.2 U2.39 | length 3.2
  Top Layer w0.254: U2.39 17.11,14.299 17.11,13.39 17.827,12.673 18.377,12.673 R23.2
NetR24_2: R24.2 R26.1 U2.27 | length 19.2
  Top Layer w0.254: R26.1 U2.27 15.862,20.25 18.325,17.787 v1(18.325,17.025) ; v1(18.442,7.881) 18.3,7.738 18.3,6.425 R24.2
  Bottom Layer w0.254: v1(18.325,17.025) 18.327,17.023 18.327,13.231 19.225,12.333 19.225,9.5 18.875,9.15 18.875,8.3 18.456,7.881 v1(18.442,7.881)
NetR25_1: R25.1 U2.32 | length 4.6
  Top Layer w0.254: R25.1 11.448,19.114 11.448,18.927 11.65,18.725 12.617,18.725 13.592,17.75 U2.32
NetR26_2: R26.2 U2.25 | length 2.7
  Top Layer w0.254: R26.2 12.825,22.225 14.05,22.225 14.253,22.022 14.253,21.273 14.276,21.25 U2.25
NetR27_1: R27.1 U2.33 | length 4.3
  Top Layer w0.254: R27.1 11.625,18.2 12.5,18.2 13.45,17.25 U2.33
NetR28_1: R28.1 U2.2 | length 10.5
  Top Layer w0.254: v1(21.363,16.25) U2.2 ; v1(24.875,10.625) 24.906,10.594 25.281,10.594 R28.1
  Bottom Layer w0.254: v1(21.363,16.25) 21.825,16.25 24.175,13.9 24.175,11.325 v1(24.875,10.625)
NetR29_2: R29.2 U2.44 | length 6.2
  Top Layer w0.254: U2.44 19.61,14.299 19.61,13.415 20.3,12.725 20.3,8.75 R29.2
NetR31_1: R31.1 U2.3 | length 9.7
  Top Layer w0.254: v1(21.65,17.225) 22.125,16.75 U2.3 ; v1(24.875,11.65) 26,11.65 R31.1
  Bottom Layer w0.254: v1(21.65,17.225) 24.875,14 v1(24.875,11.65)
ST_SWCLK: P6.3 U2.37 | length 16
  Top Layer w0.254: P6.3 11.95,2.575 11.95,6.191 12.634,6.875 14.267,6.875 16.1,8.708 U2.37
ST_SWDIO: P6.2 U2.34 | length 19.6
  Top Layer w0.254: P6.2 11.475,2.34 11.475,6.358 12.463,7.346 14.096,7.346 15.35,8.6 15.35,15.025 15.966,15.641 15.966,16.417 15.632,16.75 U2.34
TARGET_NRST: P2.6 P3.4 R15.1 | length 22.2
  Top Layer w0.254: R15.1 20.948,4.498 21.473,4.498 23.275,6.3 28.15,6.3 28.693,5.757 28.693,4.767 P3.4 31.335,7.175 35.55,7.175 37.325,8.95 P2.6
TARGET_SWCLK: P2.4 P3.3 R22.1 | length 35.6
  Top Layer w0.254: R22.1 17.8,1.375 25.925,1.375 26.55,2 v1(29.125,2) ; P3.3 33.3,6.6 37.787,6.6 38.262,6.125 40.1,6.125 40.475,6.5 40.475,10.875 39.9,11.45 P2.4
  Bottom Layer w0.254: v1(29.125,2) 29.125,2.094 31.35,4.319 P3.3
TARGET_SWDIO: P2.3 P3.2 R24.1 | length 33
  Top Layer w0.254: R24.1 19.9,2.825 32.065,2.825 P3.2 35.14,5.9 37.6,5.9 37.975,5.525 40.2,5.525 41.023,6.348 41.023,12.202 40.525,12.7 P2.3
TARGET_SWO: P3.5 R20.2 | length 12.2
  Top Layer w0.254: R20.2 18.9,2.05 v1(24.2,2.05) v1@24.225,2.025
  Bottom Layer w0.254: v1(24.2,2.05) 25.25,2.05 26.27,3.07 P3.5
USART_RX: LD1.2 P1.1 P5.2 R19.2 | length 20.5
  Top Layer w0.254: P1.1 34.7,36.335 34.7,35.175 35.075,34.8 35.075,34.35 35.275,34.15 35.275,33.7 LD1.2 37.275,33.275 R19.2 R19.2@37.773,33.723 ; P5.2 38.488,25.337 39.687,25.337 40.175,25.825 v1(40.175,26.575)
  Bottom Layer w0.254: P1.1@35.275,36.375 36.85,34.8 36.85,34.185 40.175,30.86 v1(40.175,26.575)
USART_TX: LD2.2 P1.2 P5.3 R16.2 | length 21.8
  Top Layer w0.254: P1.2 37.48,36.5 37.851,36.128 37.972,36.128 39.075,35.025 R16.2 40.65,33.25 LD2.2 ; P5.3 38.488,24.087 40.012,24.087 v1(40.825,24.9)
  Bottom Layer w0.254: P1.2 37.304,36.271 37.304,34.621 40.825,31.1 v1(40.825,24.9)
USB_N: R25.2 USB1.A7 USB1.B7 | length 6.6
  Top Layer w0.254: USB1.A7 4.949,18.3 4.8,18.449 4.8,19.151 4.949,19.3 USB1.B7 8.775,19.3 ccw(c8.775,19.5) R25.2@8.975,19.5
USB_P: R10.2 R27.2 USB1.A6 USB1.B6 | length 6.9
  Top Layer w0.254: USB1.B6@6.328,17.8 7.775,17.8 ; USB1.A6@6.546,18.792 6.561,18.777 7.162,18.777 7.164,18.775 7.55,18.775 7.775,18.55 7.775,17.8 ; R10.2 R27.2 8.975,17.575 8.75,17.8 7.775,17.8
USB_RENUMn: R7.1 U2.38 | length 10
  Top Layer w0.254: R7.1 9.723,12.273 10.327,12.273 v1(10.363,12.237) ; U2.38 16.6,13.149 16.825,12.924 v1(16.825,12.237)
  Bottom Layer w0.254: v1(10.363,12.237) v1(16.825,12.237)
VBUS: F1.1 USB1.A4 USB1.A9 USB1.B4 USB1.B9 | length 11
  Top Layer w0.254: F1.1 2.427,25.2 2.9,24.727 2.9,20.675 ; 2.9,18.82 2.9,20.675 ; USB1.A9@5.72,16 USB1.A9 ; USB1.A4@6.343,21.123 USB1.A4 5.72,21.1 5.295,20.675 2.9,20.675
VCC_TARGET: P2.1 P3.1 S1.2 S1.5 | length 54.6
  Top Layer w0.5: 27.07,31.867 30.833,31.867 v1(31.417,31.283) v1(32.05,30.65) ; v1(34.925,28.15) 34.937,28.138 35.913,28.138 v1(35.925,28.125) ; v1@35.925,28.15 40,28.15 41.65,26.5 41.65,22.7 38.715,19.765 P2.1 40.925,15.2 41.6,14.525 41.6,5.575 40.675,4.65 P3.1
  Top Layer w1: S1.2 27.07,31.867 S1.5
  Bottom Layer w0.5: v1(31.417,31.283) 34.55,28.15 v1(34.925,28.15) 34.937,28.138 35.913,28.138 v1(35.925,28.125)
pads on no net: P2. P2.2 P2.5 P5. P5.1 S1.1 S1.4 U2.4 U2.11 U2.14 U2.15 U2.16 U2.17 U2.19 U2.21 U2.22 U2.28 U2.29 U2.40 U2.41 U2.42 U2.43 U2.45 U2.46 USB1.0 USB1.A8 USB1.B8

## Polygon pours and split planes (outlines as drawn)
GND on Top Layer "Top GND" (solid, remove dead copper, pour order 6): 0,4 0,34 cw(c4,34) 4,38 41.5,38 cw(c41.5,34) 45.5,34 45.5,4 cw(c41.5,4) 41.5,0 4,0 cw(c4,4)
3V3 on Top Layer "3V3_L01_P005" (solid, remove dead copper, pour order 5): 9.3,30.8 9.5,30.6 10.6,30.6 10.8,30.8 10.8,32.1 10.9,32.2 15.7,32.2 15.7,34.4 15.6,34.5 9.5,34.5 9.3,34.3
NetL1_1 on Top Layer "NETL1_1_L01_P004" (solid, remove dead copper, pour order 4): 9,28.8 15.8,28.8 15.8,29.7 9,29.7
GND on Top Layer "GND_L01_P003" (solid, remove dead copper, pour order 3): 6.1,34.2 6.4,34.5 8.6,34.5 8.8,34.3 8.8,28.7 9,28.5 10,28.5 10,27.9 7.8,27.9 7.8,30 6.3,30 6.1,30.2
VBUS on Top Layer "VBUS_L01_P002" (solid, remove dead copper, pour order 2): 1.1,25.9 3.225,25.9 3.925,25.2 3.925,22.5 4.425,22 5,22 5.3,21.7 5.3,21.4 5.5,21.2 7.1,21.2 7.2,21.1 7.2,20.8 7.1,20.7 4.8,20.7 4.4,20.3 4.4,17.5 5.5,16.4 7,16.4 7.1,16.3 7.1,16 7,15.9 3.1,15.9 2.3,16.7 2.3,23.3 0.9,24.7 0.9,25.7
5V on Top Layer "5V_L01_P001" (solid, remove dead copper, pour order 1): 7.4,28.6 5.6,28.6 4,28.6 3.6,28.2 3.6,27.8 3.3,27.5 1.2,27.5 1,27.7 1,34.3 1.3,34.6 5.2,34.6 5.5,34.3 5.5,30.6 6.4,29.7 7.4,29.7 7.6,29.5 7.6,28.8
GND on Bottom Layer "Buttom Layer GND" (solid, pour order 7): 0,4 0,34 cw(c4,34) 4,38 41.5,38 cw(c41.5,34) 45.5,34 45.5,4 cw(c41.5,4) 41.5,0 4,0 cw(c4,4)

## Keep-outs
Keep-Out Layer:
  lines w0.254: -0.127,3.999 ccw(c4,4) 4,-0.127 ; -0.127,3.999 cw(c4,4) -0.127,4 ; -0.127,3.999 cw(c0,4) -0.127,4 ; -0.127,4 ccw(c0,4) -0.127,4 ; -0.127,4 -0.127,34 ; -0.127,34 cw(c4,34) 3.998,38.127 ; -0.127,34 -0.127,34 ; 3.998,38.127 cw(c4,38) 4,38.127 ; 3.998,38.127 cw(c4,34) 4,38.127 ; 4,-0.127 41.5,-0.127 ; 4,-0.127 4,-0.127 ; 4,-0.127 4,-0.127 ; 4,38.127 41.5,38.127 ; 41.5,-0.127 ccw(c41.5,4) 45.627,3.999 ; 41.5,-0.127 ccw(c41.5,4) 41.5,-0.127 ; 41.5,-0.127 41.5,-0.127 ; 41.501,38.127 ccw(c41.5,34) 41.5,38.127 ; 41.501,38.127 cw(c41.5,34) 45.627,34.002 ; 41.501,38.127 ccw(c41.5,38) 41.5,38.127 ; 45.627,3.999 ccw(c45.5,4) 45.627,4 ; 45.627,3.999 ccw(c41.5,4) 45.627,4 ; 45.627,4 ccw(c41.5,4) 45.627,4 ; 45.627,4 45.627,34 ; 45.627,34 ccw(c45.5,34) 45.627,34.002 ; 45.627,34 ccw(c45.5,34) 45.627,34 ; 45.627,34 ccw(c41.5,34) 45.627,34.002

## Other copper
Top Layer:
  region net 3V3: 24.95,14.825 24.95,16.7 25.175,16.925 26.825,16.925 27.1,16.65 27.1,14.825
  pour cut-out: 11.2,32.45 11.2,30.15 15.8,30.15 15.8,32.45
  pour cut-out: 30.15,26.05 35.075,26.05 35.075,10 30.15,10
Bottom Layer:
  pour cut-out: 11.2,34.05 11.2,28.75 15.8,28.75 15.8,34.05
  pour cut-out: 29.7,26.125 35.3,26.125 35.3,9.975 29.7,9.975

## Silkscreen, mask and mechanical layers (free items; w line width, h text height)
Top Overlay:
  text "VCC TARGET" at 24.525,37 h1
  text "ON" at 24.15,36.25 h0.8
  text "OFF" at 29,36.25 h0.8
  text "3V3" at 15.125,35.8 h0.8
  text "TX" at 36.675,34.45 h0.8
  text "RX" at 34.1,34.425 h0.8
  text "GND" at 39.025,34.434 h0.8
  text "5V" at 1.125,31.45 h0.8
  text "RX" at 36.35,25.1 h0.8
  text "TX" at 36.425,23.85 h0.8
  text "GND" at 35.8,22.6 h0.8
  text "VCC / Target" at 35.45,14.8 h0.8
  text "SWDIO" at 35.3,12.434 h0.8
  text "SWCLK" at 35.125,11.234 h0.8
  text "NRST" at 35.75,8.659 h0.8
  text "GND" at 35.9,7.434 h0.8
  text "GND" at 22.9,6.284 h0.8
  text "SWO" at 25.375,6.284 h0.8
  text "NRST" at 27.925,6.284 h0.8
  text "CLK" at 30.625,6.284 h0.8
  text "DIO" at 33.275,6.284 h0.8
  text "VCC_TAR" at 35.101,6.242 h0.8
  text "DIO" at 10.3,3.309 h0.8
  text "CLK" at 12.575,3.284 h0.8
  text "VCC_TARGET" at 35.626,2.292 h0.8
  text "GND" at 22.95,2.259 h0.8
  text "SWO" at 25.425,2.259 h0.8
  text "NRST" at 27.975,2.259 h0.8
  text "CLK" at 30.675,2.259 h0.8
  text "DIO" at 33.325,2.259 h0.8
  text "3V3" at 5.125,1.159 h0.8
  text "GND" at 17.35,1.134 h0.8
  text "STLinkV2.1 B.C Rev1 2024-04-09" at 19.8,0.5 h1.5

## Text inside footprints (layer, text, board x,y; h text height)
F1: Mechanical 7 "0.75mm" at 2.05,25.6 h0.5 r90